# Altium PCB PCB_Vigne_Periph.PCBDOC
Units mm, origin at the board's own origin, x right, y up, seen from the top; angles counter-clockwise.
Board outline 299.72 x 199.9 mm, 2 copper layers (Top Layer, Bottom Layer); 20 components, 20 nets, 108 pads, 11 vias.
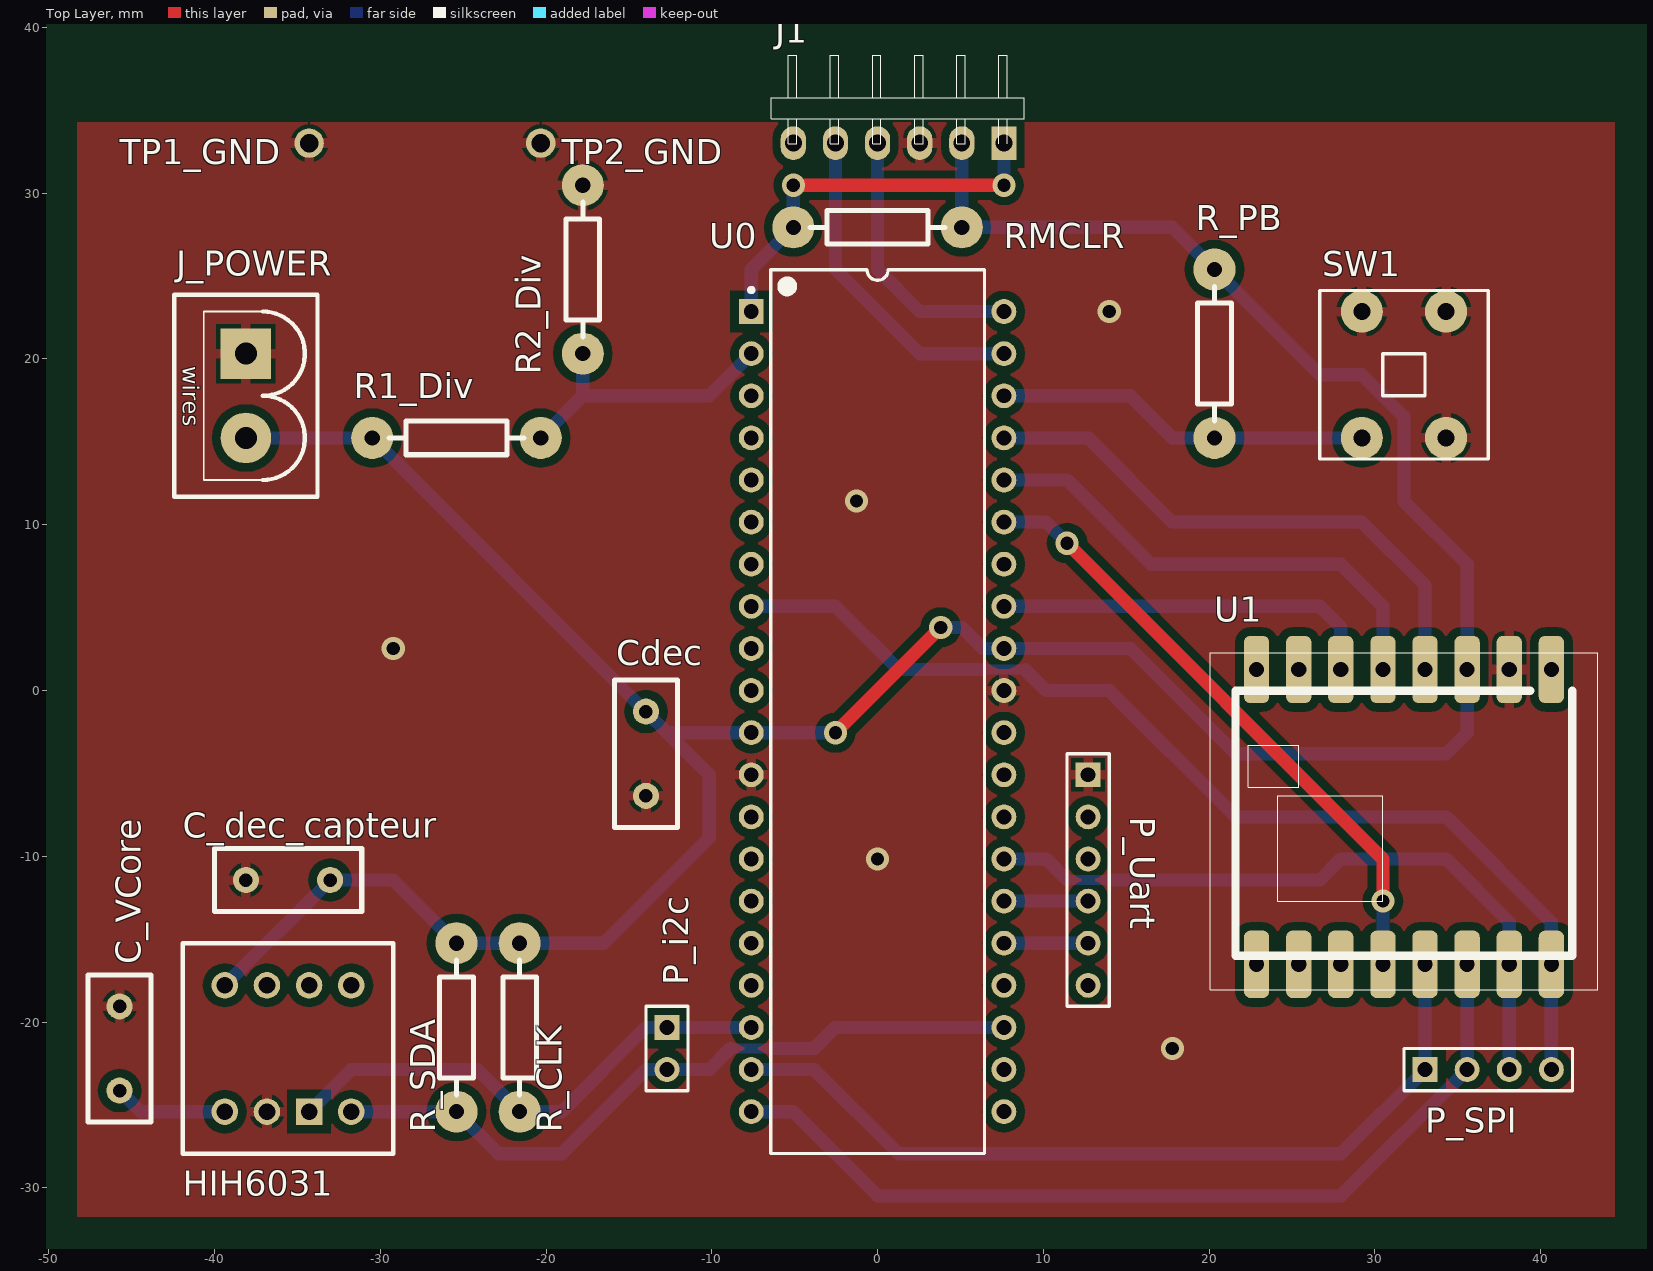
[diagram p0: Top Layer view]
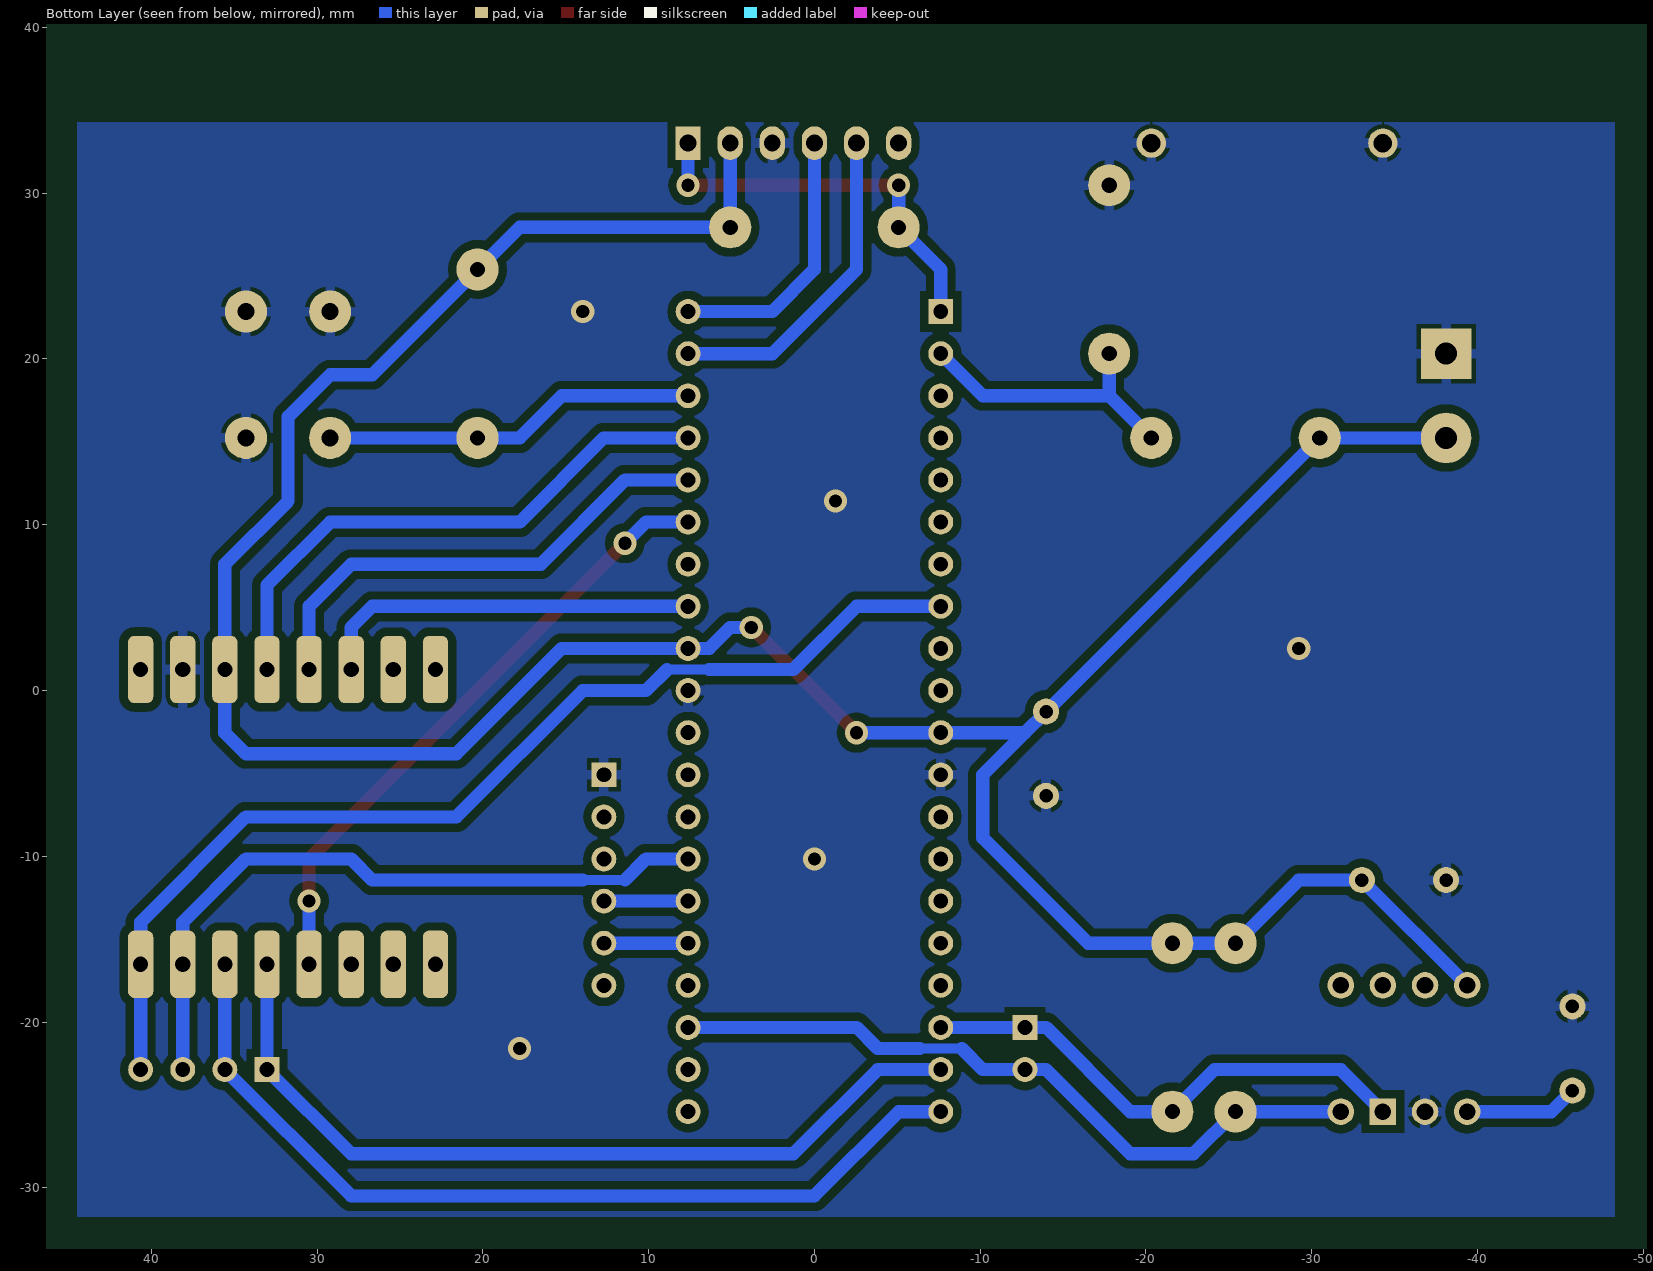
[diagram p1: Bottom Layer view, seen from below]

## Layer stack, top to bottom
Top Solder: solder mask 0.0102, Solder Resist, Dk 3.5
Top Layer: signal copper 0.0356
Dielectric1: dielectric 0.32, FR-4, Dk 4.8
Bottom Layer: signal copper 0.0356
Bottom Solder: solder mask 0.0102, Solder Resist, Dk 3.5

## Board outline
-149.275,-97.19 150.445,-97.19 150.445,102.708 -149.275,102.708

## Design rules (kind name [scope] priority, off if disabled: settings)
Clearance Clearance_bottom_polygon [OnLayer('Bottom Layer') Or OnLayer('Multi-Layer') vs OnLayer('Bottom Layer')  And  InPoly] p1: gap=0.508
Clearance Clearance_bottom_polygon_keepout [OnLayer('Bottom Layer') Or OnLayer('Multi-Layer') Or InPoly vs OnLayer('Keepout')] p2: gap=0
Clearance Clearance_top_polygon [OnLayer('Top Layer')  Or OnLayer('Multi-Layer') vs OnLayer('Top Layer') And InPoly] p3: gap=0.508
Clearance Clearance_bottom [OnLayer('Bottom Layer') Or OnLayer('Multi-Layer') vs OnLayer('Bottom Layer')  And Not InPoly] p4: gap=0.203
Clearance Clearance_top [OnLayer('Top Layer')  Or OnLayer('Multi-Layer') vs OnLayer('Top Layer') And Not InPoly] p5: gap=0.203
Clearance Clearance_pad_to_pad [OnLayer('Multi-Layer') vs OnLayer('Multi-Layer')] p6: gap=0.254
ComponentClearance ComponentClearance_bottom [OnLayer('Bottom Overlay') vs OnLayer('Bottom Overlay')] p1: gap=0 collisioncheckmode=3 verticalgap=0.254 showdistances=FALSE
ComponentClearance ComponentClearance_top [OnLayer('Top Overlay') vs OnLayer('Top Overlay')] p2: gap=0 collisioncheckmode=3 verticalgap=0.254 showdistances=FALSE
FabricationTestPointUsage TestPointUsage [All] p1: valid=0 allowmultiple=FALSE
FabricationTestpoint Testpoint [All] p1: side=3 testpointundercomponent=TRUE minsize=1.016 maxsize=2.54 preferedsize=1.524 minholesize=0 maxholesize=1.016 preferedholesize=0.813 testpointgrid=0.025 allowsidetop=TRUE allowsidebottom=TRUE usegrid=TRUE gridtolerance=0
HoleSize [All] p1: absolutevalues=TRUE maxlimit=25.4 minlimit=0.406 maxpercent=80.000 minpercent=20.000
MinimumAnnularRing [PadXSize_AllLayers = PadYSize_AllLayers] p1: minimumring=0.254
PermittedLayers [All] p1: toplayerpermitted=TRUE bottomlayerpermitted=TRUE
PolygonConnect [All] p1: connectstyle=Relief reliefconductorwidth=0.61 reliefentries=4 polygonreliefangle="90 Angle" airgapwidth=0.254
RoutingVias [All] p1: holewidth=0.406 width=1.27 viastyle="Through Hole" minholewidth=0.406 minwidth=0.914 maxholewidth=25.4 maxwidth=25.4
SMDToPlane [All] p1: distance=0
SolderMaskExpansion [All] p1: expansion=0.102
ViasUnderSMD [All] p1: allowed=FALSE
Width Width_botom_top [OnLayer('Bottom Layer') or OnLayer('Top Layer')] p1: maxlimit=254 minlimit=0.254 preferedwidth=0.813
26 further rules are at their usual default settings.

## Components (designator, comment, footprint, x,y, rotation, side; value= is the part's Value field where it differs from the comment)
C_dec_capteur "CAP" RAD0.2 -33.02,-11.43 r180 top
C_VCore "CAP" RAD0.2 -45.72,-19.05 r270 top
Cdec "CAP" RAD0.2 -13.97,-1.27 r270 top
HIH6031 "HIH6031" HIH6031-Traversant -39.37,-25.4 r90 top
J1 "PIC-ICSP" PIC-ICSP 7.62,33.02 r90 top
J_POWER "comment" AMP_2 -38.1,20.32 r270 top
P_i2c "Header 2" HDR1X2 -12.7,-20.32 r270 top
P_SPI "Header 4" HDR1X4 33.02,-22.86 r0 top
P_Uart "Header 6" HDR1X6 12.7,-5.08 r270 top
R1_Div "RES" AXIAL0.4 -20.32,15.24 r180 top
R2_Div "RES" AXIAL0.4 -17.78,30.48 r270 top
R_CLK "RES" AXIAL0.4 -21.59,-25.4 r90 top
R_PB "RES" AXIAL0.4 20.32,25.4 r270 top
R_SDA "RES" AXIAL0.4 -25.4,-15.24 r270 top
RMCLR "RES" AXIAL0.4 -5.08,27.94 r0 top
SW1 "SW_PB" KSA 34.29,15.24 r180 top
TP1_GND "TESTPOINT" testpoint -34.29,33.02 r90 top
TP2_GND "TESTPOINT" testpoint -20.32,33.02 r90 top
U0 "PIC18F46K22-I/P" MCHP-PDIP-P40 0,-1.27 r0 top
U1 "RF-LORA-868-SO" RF-LORA-868-DIP 40.64,1.27 r270 top

## Footprints (in the part's own frame and the unit in brackets; to place one, negate y for a bottom-side part, rotate by r counter-clockwise, add the part's x,y. Pads: shape width x height; smd on the part's side, far side on the other; paste and mask are expansions set on the pad)
AMP_2 [mil]
  rect 120x120 hole 52: 1(0,0)
  round 120 hole 52: 2(200,0)
  silkscreen extent -140,-170 340,170
AXIAL0.4 [mil]
  round 100 hole 36: 1(0,0) 2(400,0)
  silkscreen extent 40,-40 360,40
HDR1X2 [mm] "Connector; Header; 2 Position"
  rect 1.5x1.5 hole 0.9: 1(0,0)
  round 1.5 hole 0.9: 2(2.54,0)
  silkscreen extent -1.27,-1.27 3.81,1.27
HDR1X4 [mm] "Connector; Header; 4 Position"
  rect 1.5x1.5 hole 0.9: 1(0,0)
  round 1.5 hole 0.9: 2(2.54,0) 3(5.08,0) 4(7.62,0)
  silkscreen extent -1.27,-1.27 8.89,1.27
HDR1X6 [mm] "Connector; Header; 6 Position"
  rect 1.5x1.5 hole 0.9: 1(0,0)
  round 1.5 hole 0.9: 2(2.54,0) 3(5.08,0) 4(7.62,0) 5(10.16,0) 6(12.7,0)
  silkscreen extent -1.27,-1.27 13.97,1.27
HIH6031-Traversant [mm]
  round 1.6 hole 1: 1(0,0) 2(0,-2.54) 4(0,-7.62) 5(7.62,-7.62) 6(7.62,-5.08) 7(7.62,-2.54) 8(7.62,0)
  rect 1.6x1.6 hole 1: 3(0,-5.08)
  silkscreen extent -2.54,-10.16 10.16,2.54
KSA [mil]
  round 100 hole 40: 1(200,-300) 2(200,0) 3(0,0) 4(0,-300)
  silkscreen extent -100,-350 300,50
MCHP-PDIP-P40 [mm] "PDIP, 40-Leads, Body 51.75x13.53mm, Pitch 2.54mm"
  rect 1.5x1.5 hole 0.9: 1(-7.62,24.13)
  round 1.5 hole 0.9: 2(-7.62,21.59) 3(-7.62,19.05) 4(-7.62,16.51) 5(-7.62,13.97) 6(-7.62,11.43) 7(-7.62,8.89) 8(-7.62,6.35) 9(-7.62,3.81) 10(-7.62,1.27) 11(-7.62,-1.27) 12(-7.62,-3.81) 13(-7.62,-6.35) 14(-7.62,-8.89) 15(-7.62,-11.43) 16(-7.62,-13.97) 17(-7.62,-16.51) 18(-7.62,-19.05) 19(-7.62,-21.59) 20(-7.62,-24.13) 21(7.62,-24.13) 22(7.62,-21.59) 23(7.62,-19.05) 24(7.62,-16.51) 25(7.62,-13.97) 26(7.62,-11.43) 27(7.62,-8.89) 28(7.62,-6.35) 29(7.62,-3.81) 30(7.62,-1.27) 31(7.62,1.27) 32(7.62,3.81) 33(7.62,6.35) 34(7.62,8.89) 35(7.62,11.43) 36(7.62,13.97) 37(7.62,16.51) 38(7.62,19.05) 39(7.62,21.59) 40(7.62,24.13)
  silkscreen extent -7.74,-26.65 6.45,26.65, body extent -7.76,-26.6 7.76,26.6, height 6.35
PIC-ICSP [mil]
  rect 80x60 hole 40: 1(0,0)
  oval 80x60 hole 40: 2(0,100) 3(0,200) 4(0,300) 5(0,400) 6(0,500)
  silkscreen extent -2,-48 208,552
RAD0.2 [mil]
  round 62 hole 32: 1(0,0) 2(200,0)
  silkscreen extent -75,-75 275,75
RF-LORA-868-DIP [mil]
  rrect50% 160x60 hole 36: 1(0,0) 2(0,-100) 3(0,-200) 4(0,-300) 5(0,-400) 6(0,-500) 7(0,-600) 8(0,-700) 9(700,-700) 10(700,-600) 11(700,-500) 12(700,-400) 13(700,-300) 14(700,-200) 15(700,-100) 16(700,0)
  silkscreen extent -40,-810 760,110
testpoint [mil]
  round 70 hole 44: 1(0,0)

## Part data
C_dec_capteur C_VCore Cdec: "capacité non polarisée"
J_POWER: library part POWER2, "connecteur alim 2 pôles"
P_i2c: "Header, 2-Pin"
P_SPI: "Header, 4-Pin"
P_Uart: "Header, 6-Pin"
R1_Div R2_Div R_CLK R_PB R_SDA RMCLR: "resistance"
U0: "Low-Power, High-Performance Microcontroller with XLP Technology, 64 MHz, 35 I/O, -40 to 85 degC, 40-pin PDIP (P40), Tube"

## Via types
v1: diameter 1.4, hole 0.8, Top Layer to Bottom Layer, 11 vias

## Nets (pads, with @x,y where several pads share a name; then routed paths per layer and width w, separated by ;. In a path a pad name is that pad's centre, name@x,y a point inside that pad or via, vN(x,y) a via of type N, cw(c..) or ccw(c..) an arc to the next point about the centre after c; other vN are vias at no path point)
CLK_RC3: HIH6031.3 P_i2c.1 R_CLK.1 U0.18 | length 30.9
  Bottom Layer w0.8: HIH6031.3 -31.75,-22.86 -24.13,-22.86 R_CLK.1 -19.05,-25.4 -13.97,-20.32 P_i2c.1 U0.18
CS_LORA_RE0: P_SPI.4 U0.8 U1.16 | length 65
  Bottom Layer w0.6: 6.35,1.27 8.89,1.27
  Bottom Layer w0.8: U0.8 -2.54,5.08 1.27,1.27 6.35,1.27 ; 8.89,1.27 10.16,0 13.97,0 21.59,-7.62 34.29,-7.62 40.64,-13.97 U1.16 P_SPI.4
DIO0_LORA_RB0: U0.33 U1.6 | length 23.4
  Bottom Layer w0.8: U0.33 26.67,5.08 27.94,3.81 U1.6
DIV_RA0: R1_Div.1 R2_Div.2 U0.2 | length 17.3
  Bottom Layer w0.8: R1_Div.1 -17.78,17.78 ; R2_Div.2 -17.78,17.78 ; U0.2 -10.16,17.78 -17.78,17.78
GND: C_dec_capteur.2 C_VCore.1 Cdec.2 HIH6031.2 J1.3 J_POWER.1 P_Uart.1 R2_Div.1 SW1.1 SW1.3 SW1.4 TP1_GND.1 TP2_GND.1 U0.12 U0.31 U1.2
  other v1: 17.78,-21.59 0,-10.16 -29.21,2.54 -1.27,11.43 13.97,22.86
MCLR: J1.1 RMCLR.1 U0.1 | length 23.9
  Top Layer w0.8: v1(-5.08,30.48) v1(7.62,30.48)
  Bottom Layer w0.8: U0.1 -7.62,25.4 RMCLR.1 v1(-5.08,30.48) ; v1(7.62,30.48) J1.1
NetC_VCore_2: C_VCore.2 HIH6031.1 | length 6.9
  Bottom Layer w0.8: C_VCore.2 -44.45,-25.4 HIH6031.1
PGC: J1.5 U0.39 | length 19.9
  Bottom Layer w0.8: J1.5 -2.54,25.4 2.54,20.32 U0.39
PGD: J1.4 U0.40 | length 16.3
  Bottom Layer w0.8: J1.4 0,25.4 2.54,22.86 U0.40
RESET_LORA_RB2: U0.35 U1.12 | length 37.6
  Top Layer w0.8: v1(11.43,8.89) 30.48,-10.16 v1(30.48,-12.7)
  Bottom Layer w0.8: U0.35 10.16,10.16 v1(11.43,8.89) ; U1.12 v1(30.48,-12.7)
RX_SW_LORA_RB4: U0.37 U1.4 | length 34.2
  Bottom Layer w0.8: U0.37 12.7,15.24 17.78,10.16 29.21,10.16 33.02,6.35 U1.4
RX_UART: P_Uart.4 U0.26 | length 5.1
  Bottom Layer w0.8: U0.26 P_Uart.4
SCLK_LORA_RD0: P_SPI.1 U0.19 U1.13 | length 51.2
  Bottom Layer w0.8: U0.19 -3.81,-22.86 1.27,-27.94 27.94,-27.94 P_SPI.1 U1.13
SDA_RC4: HIH6031.4 P_i2c.2 R_SDA.2 U0.23 | length 43.6
  Bottom Layer w0.6: -8.89,-21.59 -6.35,-21.59
  Bottom Layer w0.8: HIH6031.4 R_SDA.2 -22.86,-27.94 -19.05,-27.94 -13.97,-22.86 P_i2c.2 -10.16,-22.86 -8.89,-21.59 ; -6.35,-21.59 -3.81,-21.59 -2.54,-20.32 U0.23
SDI_LORA_RD4: P_SPI.3 U0.27 U1.15 | length 42
  Bottom Layer w0.6: 11.43,-11.43 13.97,-11.43
  Bottom Layer w0.8: U0.27 10.16,-10.16 11.43,-11.43 ; 13.97,-11.43 26.67,-11.43 27.94,-10.16 34.29,-10.16 38.1,-13.97 U1.15 P_SPI.3
SDO_LORA_RD1: P_SPI.2 U0.20 U1.14 | length 54.8
  Bottom Layer w0.8: U0.20 -5.08,-25.4 0,-30.48 27.94,-30.48 P_SPI.2 U1.14
SW_PB_RB5: R_PB.2 SW1.2 U0.38 | length 22.6
  Bottom Layer w0.8: U0.38 15.24,17.78 17.78,15.24 R_PB.2 SW1.2
TX_SW_LORA_RB3: U0.36 U1.5 | length 29.8
  Bottom Layer w0.8: U0.36 11.43,12.7 16.51,7.62 27.94,7.62 30.48,5.08 U1.5
TX_UART: P_Uart.5 U0.25 | length 5.1
  Bottom Layer w0.8: U0.25 P_Uart.5
VDD: C_dec_capteur.1 Cdec.1 HIH6031.8 J1.2 J_POWER.2 R1_Div.2 R_CLK.2 R_PB.1 R_SDA.1 RMCLR.2 U0.11 U0.32 U1.3 | length 187.9
  Top Layer w0.8: v1(-2.54,-2.54) v1(3.81,3.81)
  Bottom Layer w0.8: HIH6031.8 C_dec_capteur.1 -29.21,-11.43 R_SDA.1 R_CLK.2 -16.51,-15.24 -10.16,-8.89 -10.16,-5.08 -12.7,-2.54 ; J_POWER.2 R1_Div.2 Cdec.1 -12.7,-2.54 ; v1(-2.54,-2.54) U0.11 -12.7,-2.54 ; v1(3.81,3.81) 5.08,3.81 6.35,2.54 U0.32 15.24,2.54 21.59,-3.81 34.29,-3.81 35.56,-2.54 U1.3 35.56,7.62 31.75,11.43 31.75,16.51 29.21,19.05 26.67,19.05 R_PB.1 17.78,27.94 RMCLR.2 J1.2
pads on no net: HIH6031.5 HIH6031.6 HIH6031.7 J1.6 P_Uart.2 P_Uart.3 P_Uart.6 U0.3 U0.4 U0.5 U0.6 U0.7 U0.9 U0.10 U0.13 U0.14 U0.15 U0.16 U0.17 U0.21 U0.22 U0.24 U0.28 U0.29 U0.30 U0.34 U1.1 U1.7 U1.8 U1.9 U1.10 U1.11

## Polygon pours and split planes (outlines as drawn)
GND on Top Layer "Top Layer-No Net" (solid, pour order 4): -48.26,-31.75 44.45,-31.75 44.45,34.29 -48.26,34.29
GND on Top Layer "Top Layer-No Net" (solid, pour order 2): -48.26,34.29 -48.26,-31.75 44.45,-31.75 44.45,34.29
GND on Bottom Layer "Top Layer-No Net" (solid, pour order 6): -48.26,-31.75 -48.26,34.29 44.45,34.29 44.45,-31.75

## Keep-outs
Keep-Out Layer:
  rectangle: -148.315,-97.01 -143.315,102.99
  rectangle: -143.315,-97.01 146.685,-92.01
  rectangle: 141.685,-92.01 146.685,102.99
  rectangle: -143.315,97.99 141.685,102.99

## Silkscreen, mask and mechanical layers (free items; w line width, h text height)
Mechanical 1:
  lines w0.254: -48.26,-31.75 44.45,-31.75 44.45,34.29 -48.26,34.29 -48.26,-31.75
Mechanical 32:
  text "Les bandes en violet delimitent la surface utilisable...." at -135.382,118.466 h5.08
  text "Mais vous n'etes pas obliges de tout utiliser!!" at -117.602,107.899 h5.08
  text "ATTENTION:" at 158.013,89.179 h5.08
  text "Par defaut, les pistes" at 158.013,78.765 h5.08
  text "ont 32mil de largeur" at 157.886,69.164 h5.08
  text "En cas de besoin, cette largeur" at 158.166,59.969 h5.08
  text "peut etre reduite jusqu'a 10 mil" at 157.886,49.606 h5.08
  text "Par defaut, les vias" at 158.598,31.852 h5.08
  text "ont un diam. de 50 mil" at 158.445,21.692 h5.08
  text "En cas de besoin, ce diam." at 157.582,9.601 h5.08
  text "peut etre reduit jusqu'a 36 mil" at 158.191,-1.321 h5.08

## Text inside footprints (layer, text, board x,y; h text height)
J_POWER: Top Overlay "wires" at -41.91,19.558 h1 r270